# Altium PCB biv2-LRF_1a.PcbDoc
Units mm, origin at the board's own origin, x right, y up, seen from the top; angles counter-clockwise.
Board outline 54 x 54 mm, 2 copper layers (Top Layer, Bottom Layer), stack 1.536 mm thick; 89 components, 70 nets, 305 pads, 152 vias.
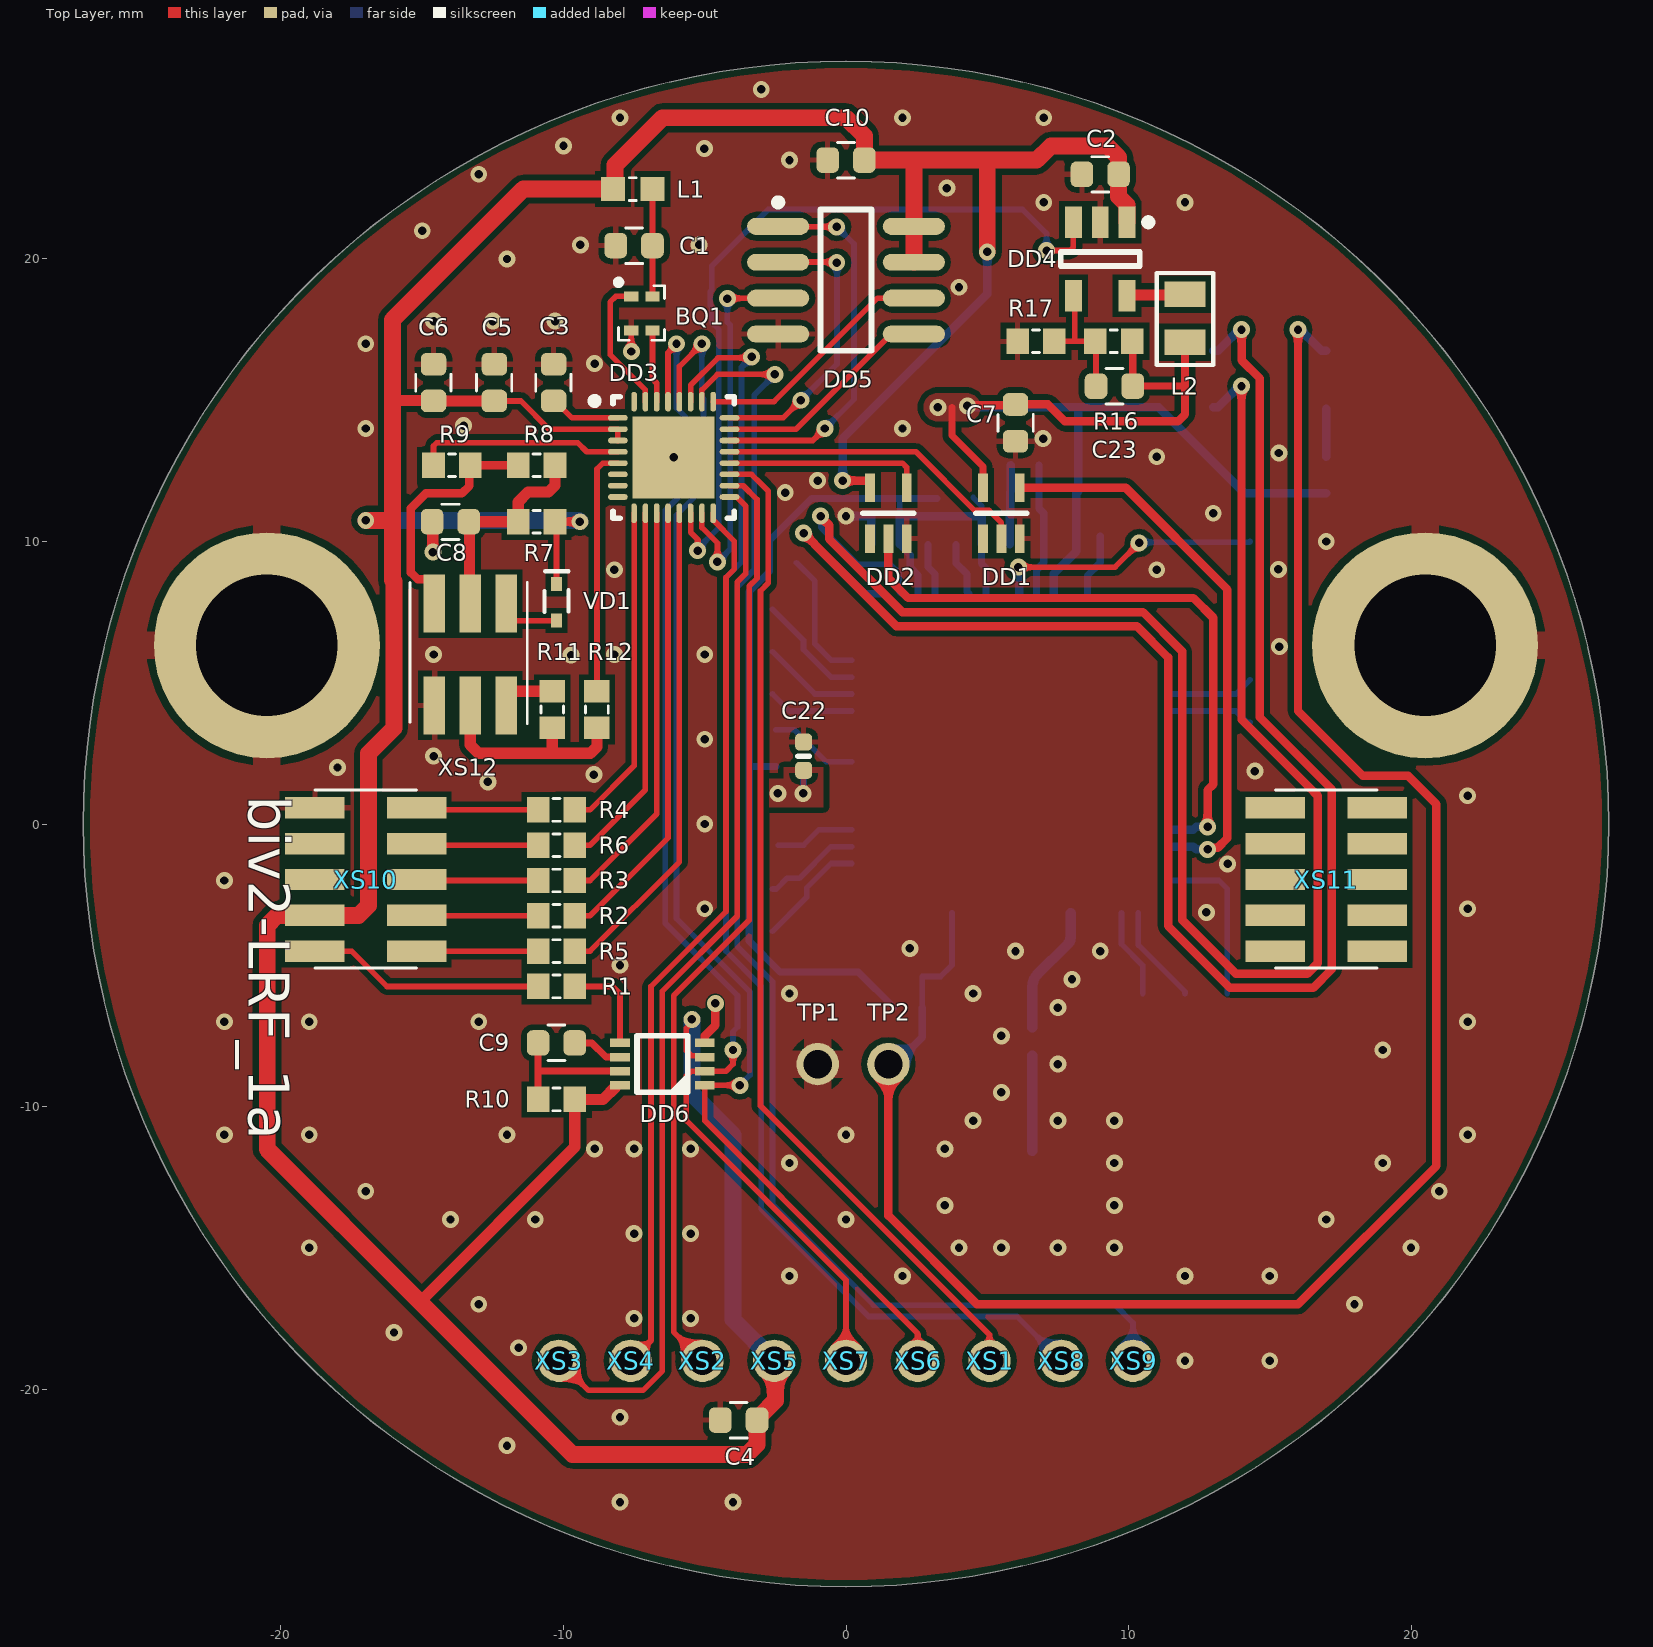
[diagram p0: Top Layer view]
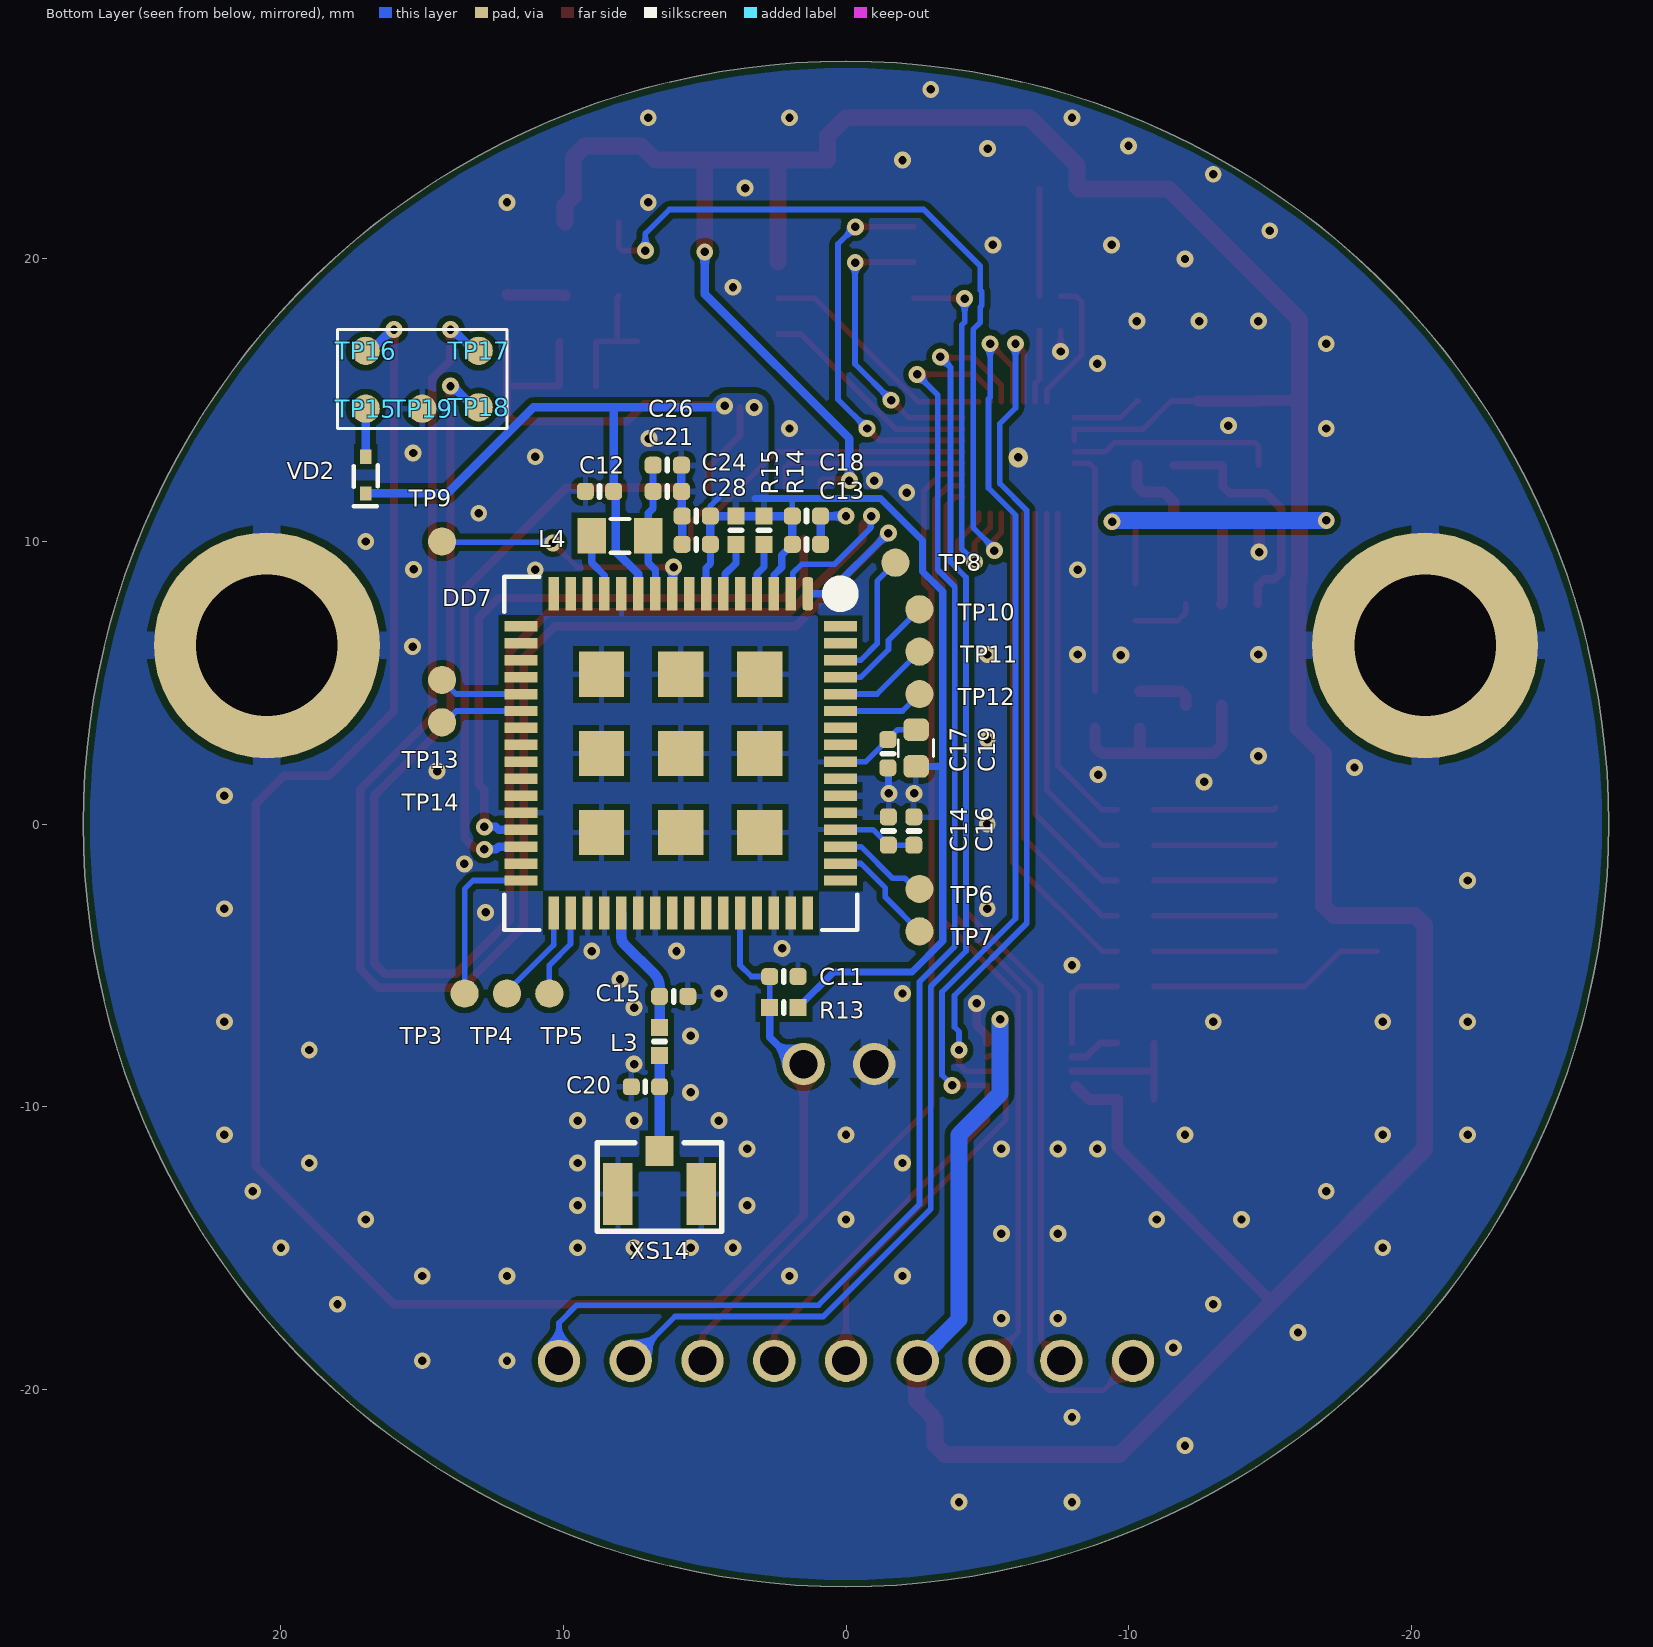
[diagram p1: Bottom Layer view, seen from below]
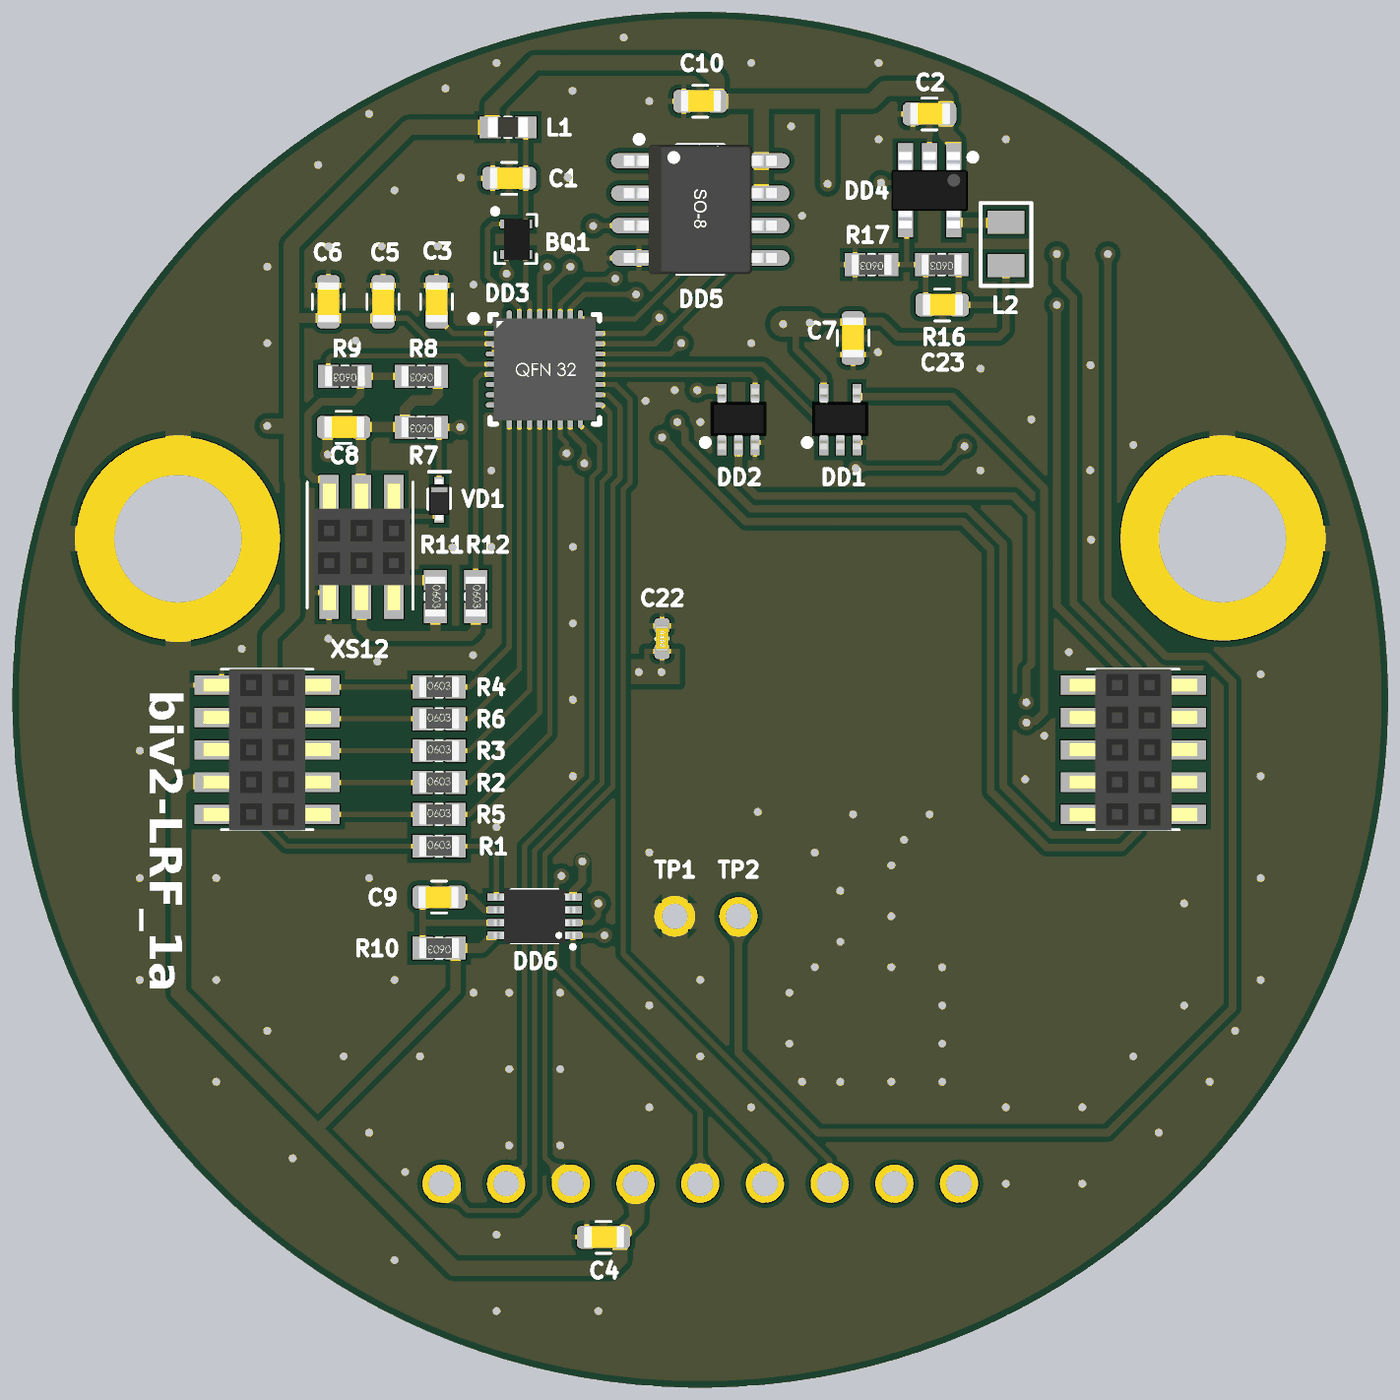
[diagram p2: 3D render of the assembled board from above, using the file's embedded part models]
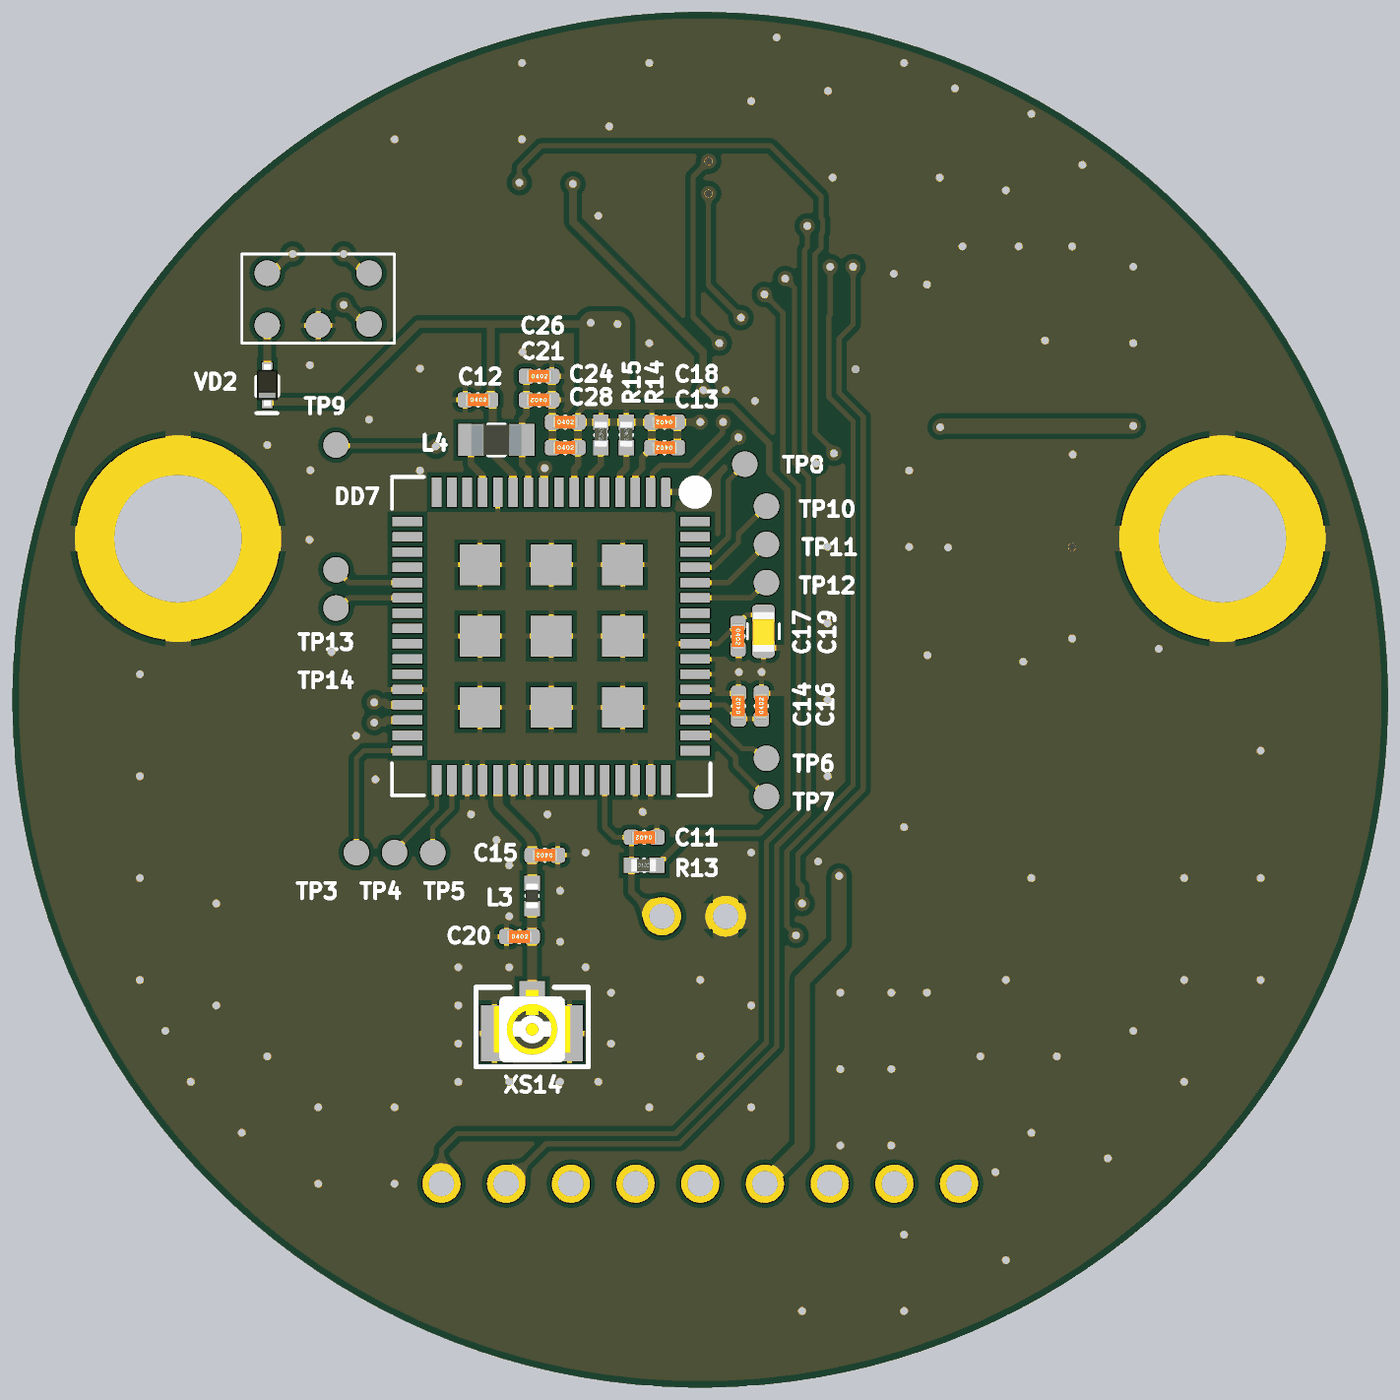
[diagram p3: 3D render of the assembled board from below, using the file's embedded part models]

## Layer stack, top to bottom
Top Solder: solder mask 0.0254, SM-001, Dk 4
Top Layer: signal copper 0.018
Dielectric 1: core 1.5, FR4, Dk 4.6
Bottom Layer: signal copper 0.018
Bottom Solder: solder mask 0.0254, SM-001, Dk 4

## Board outline
-27,0 ccw(c0,0) 0,-27 ccw(c0,0) 27,0 ccw(c0,0) 0,27 ccw(c0,0)

## Design rules (kind name [scope] priority, off if disabled: settings)
AcuteAngle [All] p1: minimum=3.50000000000000E+0001 checktracksonly=FALSE
BoardOutlineClearance "BoardOutlineClearance 1" [All] p1: gap=0.25 ignorepadtopadclearanceinfootprint=FALSE except(0: Arc-SplitContinuation Track-SplitContinuation SMDPad-SplitContinuation THPad-SplitContinuation Via-SplitContinuation Fill-SplitContinuation Poly-SplitContinuation Region-SplitContinuation Text-SplitContinuation) // Milling
BoardOutlineClearance "BoardOutlineClearance 2" [All] p2: gap=0.4 ignorepadtopadclearanceinfootprint=FALSE except(0: Arc-SplitContinuation Track-SplitContinuation SMDPad-SplitContinuation THPad-SplitContinuation Via-SplitContinuation Fill-SplitContinuation Poly-SplitContinuation Region-SplitContinuation Text-SplitContinuation) // V-Cut
Clearance "Clearance-1 1 Oz" [All] p1: gap=0.2 ignorepadtopadclearanceinfootprint=TRUE except(0.25: Arc-Hole Track-Hole SMDPad-Hole THPad-Hole Via-Hole Fill-Hole Poly-Hole Region-Hole Text-Hole) // Standart
Clearance "Clearance-1 1/2 Oz" [All] p2: gap=0.125 ignorepadtopadclearanceinfootprint=FALSE except(0.2: Arc-Fill Arc-Poly Track-Fill Track-Poly SMDPad-SMDPad SMDPad-Fill SMDPad-Poly THPad-Fill THPad-Poly Via-Fill Via-Poly Fill-Fill Fill-Poly Poly-Poly Poly-Region Poly-Text; 0.25: Arc-Hole Track-Hole SMDPad-Hole THPad-Hole Via-Hole Fill-Hole Poly-Hole Region-Hole Text-Hole) // Standart
DiffPairsRouting "DiffPairsRouting 1 Oz" [All] p1: maxlimit=0.254 minlimit=0.2 mostfreqgap=0.254 toplayer_minwidth=0.2 toplayer_maxwidth=0.381 toplayer_prefwidth=0.381 bottomlayer_minwidth=0.2 bottomlayer_maxwidth=0.381 bottomlayer_prefwidth=0.381 maxuncoupledlength=12.7
DiffPairsRouting "DiffPairsRouting 1/2 Oz" [All] p2: maxlimit=0.254 minlimit=0.1 mostfreqgap=0.254 toplayer_minwidth=0.1 toplayer_maxwidth=0.381 toplayer_prefwidth=0.381 bottomlayer_minwidth=0.1 bottomlayer_maxwidth=0.381 bottomlayer_prefwidth=0.381 maxuncoupledlength=12.7
HoleSize "Minimum HoleSize" [IsPad] p1: absolutevalues=TRUE maxlimit=5.9 minlimit=0.6 maxpercent=80.000 minpercent=20.000
HoleSize "Minimum HoleSize VIA 1" [IsVia] p2: absolutevalues=TRUE maxlimit=5.9 minlimit=0.3 maxpercent=80.000 minpercent=20.000 // Standart
HoleToHoleClearance Hole2HoleClearance [All] p1: gap=0.25 allowstackedmicrovias=FALSE
MinimumAnnularRing "Minimum AR VIA Standart" [IsVia] p1: minimumring=0.15
MinimumAnnularRing "Minimum AR PAD Standart" [IsPAD] p2: minimumring=0.2
MinimumAnnularRing "Minimum AR VIA Advance" [IsVia] p3: minimumring=0.1
MinimumAnnularRing "Minimum AR PAD Advance" [IsPAD] p4: minimumring=0.15
MinimumSolderMaskSliver "SolderMask Bridge Standart" [All] p1: minsoldermaskwidth=0.15 // All Masks
MinimumSolderMaskSliver "SolderMask Bridge Advance" [All] p2: minsoldermaskwidth=0.1 // Mask LDI
PlaneClearance "PlaneClearance 1 Oz" [All] p1: clearance=0.2
PlaneClearance "PlaneClearance-1 1/2 Oz" [All] p2: clearance=0.2 // Standart
PlaneConnect "TermalConnect-1 1 Oz" [All] p1: planeconnectstyle=Relief reliefexpansion=0.2 reliefentries=4 reliefconductorwidth=0.2 reliefairgap=0.2 // Standart
PolygonConnect [InNet('GND')] p1: thpad.connectstyle=Relief thpad.reliefconductorwidth=1 thpad.reliefentries=4 thpad.polygonreliefangle="90 Angle" thpad.airgapwidth=0.254 smdpad.connectstyle=Relief smdpad.reliefconductorwidth=0.2 smdpad.reliefentries=4 smdpad.polygonreliefangle="90 Angle" smdpad.airgapwidth=0.2 via.connectstyle=Direct via.reliefconductorwidth=0.254 via.reliefentries=4 via.polygonreliefangle="90 Angle" via.airgapwidth=0.254
PolygonConnect "PolygonConnect-1 1 Oz" [All] p2: thpad.connectstyle=Relief thpad.reliefconductorwidth=0.2 thpad.reliefentries=4 thpad.polygonreliefangle="90 Angle" thpad.airgapwidth=0.2 smdpad.connectstyle=Relief smdpad.reliefconductorwidth=0.2 smdpad.reliefentries=4 smdpad.polygonreliefangle="90 Angle" smdpad.airgapwidth=0.2 via.connectstyle=Direct via.reliefconductorwidth=0.254 via.reliefentries=4 via.polygonreliefangle="90 Angle" via.airgapwidth=0.254 // Standart
PolygonConnect "PolygonConnect-1 1/2 Oz" [All] p3: thpad.connectstyle=Relief thpad.reliefconductorwidth=0.15 thpad.reliefentries=4 thpad.polygonreliefangle="90 Angle" thpad.airgapwidth=0.2 smdpad.connectstyle=Relief smdpad.reliefconductorwidth=0.2 smdpad.reliefentries=4 smdpad.polygonreliefangle="90 Angle" smdpad.airgapwidth=0.2 via.connectstyle=Direct via.reliefconductorwidth=0.254 via.reliefentries=4 via.polygonreliefangle="90 Angle" via.airgapwidth=0.254 // Standart
RoutingCorners [All] p1 off: cornerstyle=45-Degree minsetback=2.54 maxsetback=2.54
RoutingVias [All] p1: holewidth=0.3 width=0.6 viastyle="Through Hole" minholewidth=0.2 minwidth=0.4 maxholewidth=5.9 maxwidth=6.4
SilkToSilkClearance Silk2SilkClearance [All] p1 off: silktosilkclearance=0.15
SilkToSolderMaskClearance Silk2SolderMaskClearance [IsPad] p1 off: minsilkscreentomaskgap=0.15 clearancetoexposedcopper=TRUE
SolderMaskExpansion SolderMaskExpansion-1 [All] p1: expansion=0.05 istentingtop=FALSE // Standart
SolderMaskExpansion "SolderMaskExpansion LDI" [All] p2: expansion=0.025 istentingtop=FALSE // Advance
UnRoutedNet [All] p1: checkbadconnections=TRUE
Width RF [InNet('RF_ANT')] p1: maxlimit=2.624 minlimit=0.254 preferedwidth=2.624 impedanceprofiledriven=TRUE impedanceprofileid={FF087167-1A2B-4C9D-A4B8-2F5CF9C435BE} impedanceprofilevalue=50.000000 minimp=50.000000 maximp=50.000000 favimp=50.000000
Width "Width 1 Oz" [All] p2: maxlimit=10 minlimit=0.15 preferedwidth=0.2 checkconnectedcopper=TRUE
Width "Width 1/2 Oz" [All] p3: maxlimit=10 minlimit=0.1 preferedwidth=0.125 checkconnectedcopper=TRUE
20 further rules are at their usual default settings.

## Classes and differential pairs
component class MCUModule: BQ1 C1 C2 C3 C4 C5 C6 C7 C8 C9 C10 C23 DD1 DD2 DD3 DD4 DD5 DD6 L1 L2 R1 R2 R3 R4 R5 R6 R7 R8 R9 R10 R11 R12 R16 R17 SCL SDA VD1 XS1 XS2 XS3 XS4 XS5 XS6 XS7 XS8 XS9 XS10 XS11 XS12
component class LoraModule: C11 C12 C13 C14 C15 C16 C17 C18 C19 C20 C21 C22 C24 C26 C28 DD7 L3 L4 R13 R14 R15 TP1 TP2 TP3 TP4 TP5 TP6 TP7 TP8 TP9 TP10 TP11 TP12 TP13 TP14 TP15 TP16 TP17 TP18 TP19 VD2 XS14

## Components (designator, comment, footprint, x,y, rotation, side; value= is the part's Value field where it differs from the comment)
BQ1 "AMPMGFB-48.0000T" AMPMGFB(1.6x1.2) -7.6,18.675 r270 top
C1 "Ceramic capacitor, 0.1μF, X7R, ±10%, 16V, 0603, -55...+125°C" "CAP: 0603" -7.5,20.475 r0 top value=0.1μF
C2 "Ceramic capacitor, 4.7u, X7R, ±10%, 16V, 0603, -55...+125°C" "CAP: 0603" 9,23 r0 top value=4.7u
C3 "Ceramic capacitor, 0.1μF, X7R, ±10%, 16V, 0603, -55...+125°C" "CAP: 0603" -10.35,15.625 r270 top value=0.1μF
C4 "Ceramic capacitor, 4.7μF, X7R, ±10%, 16V, 0603, -55...+125°C" "CAP: 0603" -3.8,-21.1 r0 top value=4.7μF
C5 "Ceramic capacitor, 0.1μF, X7R, ±10%, 16V, 0603, -55...+125°C" "CAP: 0603" -12.45,15.625 r270 top value=0.1μF
C6 "Ceramic capacitor, 4.7μF, X7R, ±10%, 16V, 0603, -55...+125°C" "CAP: 0603" -14.6,15.625 r270 top value=4.7μF
C7 "Ceramic capacitor, 10u, X7R, ±10%, 16V, 0603, -55...+125°C" "CAP: 0603" 6,14.2 r90 top value=10u
C8 "Ceramic capacitor, 0.1μF, X7R, ±10%, 16V, 0603, -55...+125°C" "CAP: 0603" -14,10.7 r0 top value=0.1μF
C9 "Ceramic capacitor, 0.1μF, X7R, ±10%, 16V, 0603, -55...+125°C" "CAP: 0603" -10.25,-7.75 r180 top value=0.1μF
C10 "Ceramic capacitor, 0.1μF, X7R, ±10%, 16V, 0603, -55...+125°C" "CAP: 0603" 0,23.5 r0 top value=0.1μF
C11 "Ceramic capacitor, 0.1μF, X7R, ±10%, 16V, 0402, -55...+125°C" "CAP: 0402" 2.2,-5.4 r0 bottom value=0.1μF
C12 "Ceramic capacitor, 0.1uF, X7R, ±10%, 16V, 0402, -55...+125°C" "CAP: 0402" 8.725,11.775 r180 bottom value=0.1uF
C13 "Ceramic capacitor, 0.1uF, X7R, ±10%, 16V, 0402, -55...+125°C" "CAP: 0402" 1.4,9.9 r0 bottom value=0.1uF
C14 "Ceramic capacitor, 33pF, X7R, ±10%, 16V, 0402, -55...+125°C" "CAP: 0402" -1.5,-0.247 r90 bottom value=33pF
C15 "Ceramic capacitor, 3.3pF, X7R, ±10%, 16V, 0402, -55...+125°C" "CAP: 0402" 6.1,-6.1 r0 bottom value=3.3pF
C16 "Ceramic capacitor, 33pF, X7R, ±10%, 16V, 0402, -55...+125°C" "CAP: 0402" -2.4,-0.247 r90 bottom value=33pF
C17 "Ceramic capacitor, 1nF, X7R, ±10%, 16V, 0402, -55...+125°C" "CAP: 0402" -1.482,2.489 r270 bottom value=1nF
C18 "Ceramic capacitor, 0.1uF, X7R, ±10%, 16V, 0402, -55...+125°C" "CAP: 0402" 1.4,10.9 r0 bottom value=0.1uF
C19 "Ceramic capacitor, 4.7μF, X7R, ±10%, 16V, 0603, -55...+125°C" "CAP: 0603" -2.482,2.689 r270 bottom value=4.7μF
C20 "Ceramic capacitor, 3.3pF, X7R, ±10%, 16V, 0402, -55...+125°C" "CAP: 0402" 7.1,-9.3 r180 bottom value=3.3pF
C21 "Ceramic capacitor, 0.1uF, X7R, ±10%, 16V, 0402, -55...+125°C" "CAP: 0402" 6.325,11.775 r0 bottom value=0.1uF
C22 "Ceramic capacitor, 1nF, X7R, ±10%, 16V, 0402, -55...+125°C" "CAP: 0402" -1.5,2.4 r270 top value=1nF
C23 "Ceramic capacitor, 33p, X7R, ±10%, 16V, 0603, -55...+125°C" "CAP: 0603" 9.5,15.5 r0 top value=33p
C24 "Ceramic capacitor, 0.1uF, X7R, ±10%, 16V, 0402, -55...+125°C" "CAP: 0402" 5.3,10.9 r180 bottom value=0.1uF
C26 "Ceramic capacitor, 0.47uF, X7R, ±10%, 16V, 0402, -55...+125°C" "CAP: 0402" 6.325,12.7 r180 bottom value=0.47uF
C28 "Ceramic capacitor, 0.1uF, X7R, ±10%, 16V, 0402, -55...+125°C" "CAP: 0402" 5.3,9.9 r180 bottom value=0.1uF
DD1 "SN74LV1T34DCK" SC70-5 5.5,11 r90 top
DD2 "SN74LV1T34DCK" SC70-5 1.5,11 r90 top
DD3 "EFM8BB31F64G-A-QFN32" 32-QFN(4x4) -6.1,12.975 r0 top
DD4 "TPS62243DRV" SOT23-5 9,20 r270 top
DD5 "FM25CL64B-G" SO-8_N 0,19.25 r0 top
DD6 "SN74LVC1G123" 8-VSSOP -6.5,-8.5 r90 top
DD7 "ST50H" ST50H 5.85,2.5 r270 bottom
L1 "BLM18AG102SN1D" "IND: 0603" -7.55,22.475 r0 top
L2 "VLF302515MT" VLF302515MT 12,18.75 r270 top value=2.2uH
L3 "Fixed inductor, 8.2nH, ±5%, 0402, 200mA, -55...+125°C" "IND: 0402" 6.6,-7.7 r270 bottom value=8.2nH
L4 "Fixed inductor, 15μH, ±20%, 0805, 100mA, -55...+125°C" "IND: 0805" 8,10.2 r180 bottom value=15μH
R1 "Resistor film, 100, ±5%, 0603, 0.1W, -55...+125°C" "RES: 0603" -10.25,-5.75 r0 top value=100
R2 "Resistor film, 100, ±5%, 0603, 0.1W, -55...+125°C" "RES: 0603" -10.25,-3.25 r0 top value=100
R3 "Resistor film, 100, ±5%, 0603, 0.1W, -55...+125°C" "RES: 0603" -10.25,-2 r0 top value=100
R4 "Resistor film, 100, ±5%, 0603, 0.1W, -55...+125°C" "RES: 0603" -10.25,0.5 r0 top value=100
R5 "Resistor film, 100, ±5%, 0603, 0.1W, -55...+125°C" "RES: 0603" -10.25,-4.5 r0 top value=100
R6 "Resistor film, 100, ±5%, 0603, 0.1W, -55...+125°C" "RES: 0603" -10.25,-0.75 r0 top value=100
R7 "Resistor film, 1k, ±5%, 0603, 0.1W, -55...+125°C" "RES: 0603" -10.95,10.7 r180 top value=1k
R8 "Resistor film, 1k, ±5%, 0603, 0.1W, -55...+125°C" "RES: 0603" -10.95,12.7 r180 top value=1k
R9 "Resistor film, 100, ±5%, 0603, 0.1W, -55...+125°C" "RES: 0603" -13.95,12.7 r180 top value=100
R10 "Resistor film, 100, ±5%, 0603, 0.1W, -55...+125°C" "RES: 0603" -10.25,-9.75 r180 top value=100
R11 "Resistor film, 1k, ±5%, 0603, 0.1W, -55...+125°C" "RES: 0603" -10.4,4.05 r270 top value=1k
R12 "Resistor film, 100, ±5%, 0603, 0.1W, -55...+125°C" "RES: 0603" -8.817,4.05 r270 top value=100
R13 "Resistor film, 47K, ±5%, 0402, 0.063W, -55...+125°C" "RES: 0402" 2.2,-6.5 r180 bottom value=47K
R14 "Resistor film, 0R, ±5%, 0402, 0.063W, -55...+125°C" "RES: 0402" 2.9,10.4 r270 bottom value=0R
R15 "Resistor film, 0R, ±5%, 0402, 0.063W, -55...+125°C" "RES: 0402" 3.9,10.4 r270 bottom value=0R
R16 "Resistor film, 360k, ±5%, 0603, 0.1W, -55...+125°C" "RES: 0603" 9.477,17.085 r180 top value=360k
R17 "Resistor film, 180k, ±5%, 0603, 0.1W, -55...+125°C" "RES: 0603" 6.727,17.085 r180 top value=180k
TP1 "Testpoint_HS1mm" "TestPoint(without 3D)" -1,-8.5 r0 top
TP2 "Testpoint_HS1mm" "TestPoint(without 3D)" 1.5,-8.5 r0 top
TP3 "Testpoint_HS1mm" "TestPoint(without hole)"#1 13.5,-6 r90 bottom
TP4 "Testpoint_HS1mm" "TestPoint(without hole)"#1 12,-6 r90 bottom
TP5 "Testpoint_HS1mm" "TestPoint(without hole)"#1 10.5,-6 r90 bottom
TP6 "Testpoint_HS1mm" "TestPoint(without hole)"#2 -2.5,-2.3 r90 bottom
TP7 "Testpoint_HS1mm" "TestPoint(without hole)"#2 -2.5,-3.8 r90 bottom
TP8 "Testpoint_HS1mm" "TestPoint(without hole)"#1 -1.75,9.25 r90 bottom
TP9 "Testpoint_HS1mm" "TestPoint(without hole)"#1 14.3,10 r90 bottom
TP10 "Testpoint_HS1mm" "TestPoint(without hole)"#1 -2.6,7.6 r0 bottom
TP11 "Testpoint_HS1mm" "TestPoint(without hole)"#1 -2.6,6.1 r90 bottom
TP12 "Testpoint_HS1mm" "TestPoint(without hole)"#1 -2.6,4.6 r0 bottom
TP13 "Testpoint_HS1mm" "TestPoint(without hole)"#1 14.3,5.1 r0 bottom
TP14 "Testpoint_HS1mm" "TestPoint(without hole)"#1 14.3,3.6 r0 bottom
TP15 "Testpoint_HS1mm" "TestPoint(without hole)"#1 17,14.7 r180 bottom
TP16 "Testpoint_HS1mm" "TestPoint(without hole)"#1 17,16.75 r270 bottom
TP17 "Testpoint_HS1mm" "TestPoint(without hole)"#1 13,16.75 r180 bottom
TP18 "Testpoint_HS1mm" "TestPoint(without hole)"#1 13,14.75 r180 bottom
TP19 "Testpoint_HS1mm" "TestPoint(without hole)"#1 15,14.7 r270 bottom
VD1 "Schottky diode, 80V, 500mA, 1V, 15pF, SOD-123, -55...+150°C" "DIODE: SOD523" -10.25,7.2 r90 top
VD2 "Schottky diode, 80V, 500mA, 1V, 15pF, SOD-123, -55...+150°C" "DIODE: SOD523" 17,13 r270 bottom
XS1 "Testpoint_HS1mm" "TestPoint(without 3D)" 5.08,-19 r0 top locked
XS2 "Testpoint_HS1mm" "TestPoint(without 3D)" -5.08,-19 r0 top locked
XS3 "Testpoint_HS1mm" "TestPoint(without 3D)" -10.16,-19 r0 top locked
XS4 "Testpoint_HS1mm" "TestPoint(without 3D)" -7.62,-19 r0 top locked
XS5 "Testpoint_HS1mm" "TestPoint(without 3D)" -2.54,-19 r0 top locked
XS6 "Testpoint_HS1mm" "TestPoint(without 3D)" 2.54,-19 r0 top locked
XS7 "Testpoint_HS1mm" "TestPoint(without 3D)" 0,-19 r0 top locked
XS8 "Testpoint_HS1mm" "TestPoint(without 3D)" 7.62,-19 r0 top locked
XS9 "Testpoint_HS1mm" "TestPoint(without 3D)" 10.16,-19 r0 top locked
XS10 "PBD1.27-10SA" "CON: PBD-10-1.27S" -17,-2 r90 top locked
XS11 "PBD1.27-10SA" "CON: PBD-10-1.27S" 17,-2 r90 top locked
XS12 "PBD 1.27-6R" "CON: PBD1.27-6" -12.03,7.8 r180 top
XS14 "Connector u.FL, 50 Ohm, 6GHz" "CON: u.Fl" 6.6,-13.1 r0 bottom

## Footprints (in the part's own frame and the unit in brackets; to place one, negate y for a bottom-side part, rotate by r counter-clockwise, add the part's x,y. Pads: shape width x height; smd on the part's side, far side on the other; paste and mask are expansions set on the pad)
8-VSSOP [mm]
  rect 0.3x0.7 smd: 1(-0.75,-1.5) 2(-0.25,-1.5) 3(0.25,-1.5) 4(0.75,-1.5) 5(0.75,1.5) 6(0.25,1.5) 7(-0.25,1.5) 8(-0.75,1.5)
  round 0.3 on Top Overlay: ""(-1.2,-1.5)
  round 0.3 on Mech1: ""(-0.75,-1.3)
  silkscreen extent -1,-0.9 1,0.9, body extent -1.05,-1.6 1.05,1.6, height 0.9
32-QFN(4x4) [mm] "QFN, 32-Leads, Body 4,00x4,00mm, Pitch 0,40mm, Thermal Pad 2,90x2,90mm, IPC Medium Density"
  rect 2.9x2.9 smd: 0(0,0)
  oval 0.7x0.2 smd: 1(-1.975,1.4) 2(-1.975,1) 3(-1.975,0.6) 4(-1.975,0.2) 5(-1.975,-0.2) 6(-1.975,-0.6) 7(-1.975,-1) 8(-1.975,-1.4) 17(1.975,-1.4) 18(1.975,-1) 19(1.975,-0.6) 20(1.975,-0.2) 21(1.975,0.2) 22(1.975,0.6) 23(1.975,1) 24(1.975,1.4)
  oval 0.2x0.7 smd: 9(-1.4,-1.975) 10(-1,-1.975) 11(-0.6,-1.975) 12(-0.2,-1.975) 13(0.2,-1.975) 14(0.6,-1.975) 15(1,-1.975) 16(1.4,-1.975) 25(1.4,1.975) 26(1,1.975) 27(0.6,1.975) 28(0.2,1.975) 29(-0.2,1.975) 30(-0.6,1.975) 31(-1,1.975) 32(-1.4,1.975)
  silkscreen extent -2.92,-2.15 2.15,2.15, body extent -2,-2 2,2, height 0.57
AMPMGFB(1.6x1.2) [mm]
  rect 0.35x0.5 smd: 1(0,0) 2(1.2,0) 3(1.2,0.75) 4(0,0.75)
  silkscreen extent -0.57,-0.8 1.55,1.17, body extent -0.2,-0.1 1.4,0.9, height 0.5
"CAP: 0402" [mm]
  rrect50% 0.6x0.6 smd: 1(-0.5,0) 2(0.5,0)
  silkscreen extent 0,-0.2 0,0.2, body extent -0.51,-0.25 0.51,0.25, height 0.51
"CAP: 0603" [mm]
  rrect50% 0.8x0.9 smd: 1(-0.65,0) 2(0.65,0)
  silkscreen extent -0.3,-0.63 0.3,0.62, body extent -0.78,-0.43 0.83,0.44, height 0.8
"CON: PBD1.27-6" [mm]
  rect 0.76x2.05 smd: 1(0,0) 2(0,3.6) 3(1.27,0) 4(1.27,3.6) 5(2.54,0) 6(2.54,3.6)
  silkscreen extent -0.75,-0.75 3.4,4.25, body extent -0.63,-0.7 3.18,4.3, height 4.5
"CON: PBD-10-1.27S" [mm]
  rect 0.76x2.1 smd: 1(-2.505,-1.8) 2(-2.505,1.8) 3(-1.235,-1.8) 4(-1.235,1.8) 5(0.035,-1.8) 6(0.035,1.8) 7(1.305,-1.8) 8(1.305,1.8) 9(2.575,-1.8) 10(2.575,1.8)
  silkscreen extent -3.1,-1.8 3.2,1.8, body extent -3.14,-2.5 3.21,2.5, height 4.5
"CON: u.Fl" [mm]
  rect 1x1.05 smd: 1(0,-1.525)
  rect 1.05x2.2 smd: 2(-1.475,0) 2(1.475,0)
  silkscreen extent -2.2,-1.81 2.2,1.31, body extent -1.5,-1.71 1.5,1.14, height 1.27
"DIODE: SOD523" [mm]
  rect 0.5x0.4 smd: 1(0,0) 2(1.3,0)
  silkscreen extent 0.3,-0.43 1.75,0.43, body extent -0.17,-0.4 1.48,0.4, height 0.65
"IND: 0402" [mm]
  rect 0.6x0.6 smd: 1(-0.5,0) 2(0.5,0)
  silkscreen extent 0,-0.2 0,0.2, body extent -0.5,-0.25 0.5,0.25, height 0.5
"IND: 0603" [mm]
  rect 0.85x0.85 smd: 1(-0.7,0) 2(0.7,0)
  silkscreen extent -0.13,-0.4 0.13,0.4, body extent -0.8,-0.4 0.8,0.4, height 0.8
"IND: 0805" [mm]
  rect 1x1.25 smd: 1(-1,0) 2(1,0)
  silkscreen extent -0.33,-0.6 0.33,0.6, body extent -1,-0.62 1,0.63, height 0.85
"RES: 0402" [mm]
  rect 0.6x0.6 smd: 1(-0.5,0) 2(0.5,0)
  silkscreen extent 0,-0.2 0,0.2, body extent -0.52,-0.25 0.48,0.25, height 0.34
"RES: 0603" [mm]
  rect 0.8x0.9 smd: 1(-0.65,0) 2(0.65,0)
  silkscreen extent -0.13,-0.4 0.13,0.4, body extent -0.8,-0.4 0.8,0.4, height 0.44
SC70-5 [mm] "pitch 0.95 mm"
  rect 1x0.35 smd: 1(-0.9,0.65) 2(-0.9,0) 3(-0.9,-0.65) 4(0.9,-0.65) 5(0.9,0.65)
  round 0.5 on Top Overlay: ""(-0.9,1.3)
  round 0.5 on Mech15: ""(-0.775,0.725)
  silkscreen extent 0,-0.9 0,0.9, body extent -1.18,-1.1 1.22,1.1, height 1.09
SO-8_N [mm] "8-Pin Small Outline Integrated Circuit 1.27 mm Pitch, IPC Medium Density"
  oval 2.2x0.6 smd: 1(-2.4,1.905) 2(-2.4,0.635) 3(-2.4,-0.635) 4(-2.4,-1.905) 5(2.4,-1.905) 6(2.4,-0.635) 7(2.4,0.635) 8(2.4,1.905)
  silkscreen extent -2.52,-2.5 0.9,2.88, body extent -3,-2.54 3,2.54, height 1.7
SOT23-5 [mm] "pitch 0.95 mm"
  rect 1.1x0.6 smd: 1(-1.3,0.95) 2(-1.3,0) 3(-1.3,-0.95) 4(1.3,-0.95) 5(1.3,0.95)
  round 0.5 on Mech13: ""(-1.1,1.1)
  silkscreen extent -1.42,-1.4 0.25,1.83, body extent -1.5,-1.5 1.5,1.5, height 1.3
ST50H [mm]
  rrect50% 1.17x0.37 smd: 1(-5.65,4.5)
  rect 1.17x0.37 smd: 2(-5.65,3.9) 3(-5.65,3.3) 4(-5.65,2.7) 5(-5.65,2.1) 6(-5.65,1.5) 7(-5.65,0.9) 8(-5.65,0.3) 9(-5.65,-0.3) 10(-5.65,-0.9) 11(-5.65,-1.5) 12(-5.65,-2.1) 13(-5.65,-2.7) 14(-5.65,-3.3) 15(-5.65,-3.9) 16(-5.65,-4.5) 33(5.65,-4.5) 34(5.65,-3.9) 35(5.65,-3.3) 36(5.65,-2.7) 37(5.65,-2.1) 38(5.65,-1.5) 39(5.65,-0.9) 40(5.65,-0.3) 41(5.65,0.3) 42(5.65,0.9) 43(5.65,1.5) 44(5.65,2.1) 45(5.65,2.7) 46(5.65,3.3) 47(5.65,3.9) 48(5.65,4.5)
  rect 0.37x1.17 smd: 17(-4.5,-5.65) 18(-3.9,-5.65) 19(-3.3,-5.65) 20(-2.7,-5.65) 21(-2.1,-5.65) 22(-1.5,-5.65) 23(-0.9,-5.65) 24(-0.3,-5.65) 25(0.3,-5.65) 26(0.9,-5.65) 27(1.5,-5.65) 28(2.1,-5.65) 29(2.7,-5.65) 30(3.3,-5.65) 31(3.9,-5.65) 32(4.5,-5.65) 49(4.5,5.65) 50(3.9,5.65) 51(3.3,5.65) 52(2.7,5.65) 53(2.1,5.65) 54(1.5,5.65) 55(0.9,5.65) 56(0.3,5.65) 57(-0.3,5.65) 58(-0.9,5.65) 59(-1.5,5.65) 60(-2.1,5.65) 61(-2.7,5.65) 62(-3.3,5.65) 63(-3.9,5.65) 64(-4.5,5.65)
  rect 1.6x1.6 smd: 65(-2.8,-2.8) 65(-2.8,0) 65(-2.8,2.8) 65(0,-2.8) 65(0,0) 65(0,2.8) 65(2.8,-2.8) 65(2.8,0) 65(2.8,2.8)
  silkscreen extent -6.25,-6.25 6.25,6.25, body extent -6,-6 6,6, height 1.1
"TestPoint(without 3D)" [mm]
  round 1.5 hole 1: 1(0,0)
"TestPoint(without hole)"#1 [mm]
  round 1 smd: 1(0,0)
"TestPoint(without hole)"#2 [mm]
  round 1 smd: 1(0,-0.1)
VLF302515MT [mm]
  rect 0.9x1.45 smd: 1(0,0) 2(1.7,0)
  silkscreen extent -0.75,-1 2.5,1

## Part data
C1 C2 C3 C4 C5 C6 C7 C8 C9 C10 C19 C23: library part Ceramic_0603, Manufacturer=Yageo, Package=0603, PartNumber=CC0603KRX7R7BB104, Temperature=-55...+125°C, Tolerance=±10%, TypeCapacitor="Ceramic capacitor", TypeDielectric=X7R, Voltage=16V, HelpURL=https://www.digikey.com/product-detail/en/yageo/CC0603KRX7R7BB104/311-1088-1-ND/302998
  C1 C3 C5 C8 C9 C10: ValueManufacturerPartNumber="Ceramic capacitor, 0.1μF, X7R, ±10%, 16V, 0603, -55...+125°C"
  C2: ValueManufacturerPartNumber="Ceramic capacitor, 4.7u, X7R, ±10%, 16V, 0603, -55...+125°C"
  C4 C6 C19: ValueManufacturerPartNumber="Ceramic capacitor, 4.7μF, X7R, ±10%, 16V, 0603, -55...+125°C"
  C7: ValueManufacturerPartNumber="Ceramic capacitor, 10u, X7R, ±10%, 16V, 0603, -55...+125°C"
  C23: ValueManufacturerPartNumber="Ceramic capacitor, 33p, X7R, ±10%, 16V, 0603, -55...+125°C"
C11 C12 C13 C14 C15 C16 C17 C18 C20 C21 C22 C24 C26 C28: library part Ceramic_0402, Manufacturer=Yageo, Package=0402, PartNumber=CC0402KRX7R7BB104, Temperature=-55...+125°C, Tolerance=±10%, TypeCapacitor="Ceramic capacitor", TypeDielectric=X7R, Voltage=16V, HelpURL=https://www.digikey.com/product-detail/en/yageo/CC0402KRX7R7BB104/311-1338-1-ND/2103122
  C11: ValueManufacturerPartNumber="Ceramic capacitor, 0.1μF, X7R, ±10%, 16V, 0402, -55...+125°C"
  C12 C13 C18 C21 C24 C28: ValueManufacturerPartNumber="Ceramic capacitor, 0.1uF, X7R, ±10%, 16V, 0402, -55...+125°C"
  C14 C16: ValueManufacturerPartNumber="Ceramic capacitor, 33pF, X7R, ±10%, 16V, 0402, -55...+125°C"
  C15 C20: ValueManufacturerPartNumber="Ceramic capacitor, 3.3pF, X7R, ±10%, 16V, 0402, -55...+125°C"
  C17 C22: ValueManufacturerPartNumber="Ceramic capacitor, 1nF, X7R, ±10%, 16V, 0402, -55...+125°C"
  C26: ValueManufacturerPartNumber="Ceramic capacitor, 0.47uF, X7R, ±10%, 16V, 0402, -55...+125°C"
DD1 DD2: "Single Buffer", ComponentLink1Description=Datasheet, ComponentLink1URL=https://www.ti.com/lit/ds/symlink/sn74lv1t34.pdf?ts=1607003293244&ref_url=https%253A%252F%252Fwww.ti.com%252Fproduct%252FSN74LV1T34
DD3: "8051 MCU Core"
DD4: "Step-down converter 300mA"
DD5: "Микросхема", ReplacementPart1Manufacturer=ISSI, ReplacementPart1PartNumber=IS25C08-2ZLI-TR, ComponentLink1Description="Manufacturer Link", ComponentLink1URL=http://www.microchip.com, ComponentLink2Description=Datasheet, ComponentLink3Description="Packaging Specification", Manufacturer=FM25CL64B-G, PartNumber=FM25CL64B-G
DD6: "Monostable Multivibrator / With Schmitt-Trigger Inputs", ComponentLink1Description=Datasheet, ComponentLink1URL=https://www.ti.com/lit/ds/symlink/sn74lvc1g123.pdf?ts=1636961729203&ref_url=https%253A%252F%252Fwww.google.com%252F
DD7: "LoRa module"
L1: "100MHz 1K"
L3: library part Inductor_0402, Manufacturer="Murata Electronics", MaxCurrent=200mA, Package=0402, PartNumber=LQG15HSR10J02D, Temperature=-55...+125°C, Tolerance=±5%, TypeInductor="Fixed inductor", HelpURL=https://www.digikey.com/product-detail/en/murata-electronics-north-america/LQG15HSR10J02D/490-2635-1-ND/662915, ValueManufacturerPartNumber="Fixed inductor, 8.2nH, ±5%, 0402, 200mA, -55...+125°C"
L4: library part Inductor_0805, Manufacturer="Murata Electronics", MaxCurrent=100mA, Package=0805, PartNumber=LQM21FN100M70L, Temperature=-55...+125°C, Tolerance=±20%, TypeInductor="Fixed inductor", HelpURL=https://www.digikey.com/product-detail/en/murata-electronics-north-america/LQM21FN100M70L/490-4029-1-ND/1016289, ValueManufacturerPartNumber="Fixed inductor, 15μH, ±20%, 0805, 100mA, -55...+125°C"
R1 R2 R3 R4 R5 R6 R7 R8 R9 R10 R11 R12 R16 R17: library part Resistor_0603, Manufacturer=Yageo, Package=0603, PartNumber=RC0603JR-07100RL, Power=0.1W, Temperature=-55...+125°C, Tolerance=±5%, TypeResistor="Resistor film", HelpURL=https://www.digikey.com/product-detail/en/yageo/RC0603JR-07100RL/311-100GRCT-ND/729644
  R1 R2 R3 R4 R5 R6 R9 R10 R12: ValueManufacturerPartNumber="Resistor film, 100, ±5%, 0603, 0.1W, -55...+125°C"
  R7 R8 R11: ValueManufacturerPartNumber="Resistor film, 1k, ±5%, 0603, 0.1W, -55...+125°C"
  R16: ValueManufacturerPartNumber="Resistor film, 360k, ±5%, 0603, 0.1W, -55...+125°C"
  R17: ValueManufacturerPartNumber="Resistor film, 180k, ±5%, 0603, 0.1W, -55...+125°C"
R13 R14 R15: library part Resistor_0402, Manufacturer=Yageo, Package=0402, PartNumber=RC0402JR-07100RL, Power=0.063W, Temperature=-55...+125°C, Tolerance=±5%, TypeResistor="Resistor film", HelpURL=https://www.digikey.com/product-detail/en/yageo/RC0402JR-07100RL/311-100JRCT-ND/729362
  R13: ValueManufacturerPartNumber="Resistor film, 47K, ±5%, 0402, 0.063W, -55...+125°C"
  R14 R15: ValueManufacturerPartNumber="Resistor film, 0R, ±5%, 0402, 0.063W, -55...+125°C"
VD1 VD2: library part Schottky_single, Current=500mA, Manufacturer="Diodes Incorporated", Package=SOD-123, PartNumber=BAT54XV2, Temperature=-55...+150°C, Voltage=80V, VoltageDrop=1V, HelpURL=https://www.digikey.com/product-detail/en/diodes-incorporated/MBR0580S1-7/MBR0580S1-7DICT-ND/5080371, RecoveryTime=15pF, TypeDiode="Schottky diode", ValueManufacturerPartNumber="Schottky diode, 80V, 500mA, 1V, 15pF, SOD-123, -55...+150°C"
XS14: library part Connector_uFL, Frequency=6GHz, Manufacturer="Hirose Electric", PartNumber=U.FL-R-SMT(01), CommentText=uFl, HelpURL=https://www.digikey.com/product-detail/en/hirose-electric-co-ltd/U.FL-R-SMT-01/H9161-ND/513010, Impedance="50 Ohm", TypeConnector="Connector u.FL", ValueManufacturerPartNumber="Connector u.FL, 50 Ohm, 6GHz"
XS10 XS11: ComponentLink1Description=Datasheet, ComponentLink1URL=https://neokt593.ru/PBD%201.27%20-%2008SA%20PBD1.27-08SA

## Free pads (board coordinates)
  round 8 hole 5: 0(-20.5,6.325) 0(20.5,6.325)

## Via types
v1: diameter 0.6, hole 0.3, Top Layer to Bottom Layer, tented both sides, 151 vias
v2: diameter 0.7, hole 0.3, Top Layer to Bottom Layer, tented bottom, 1 vias

## Nets (pads, with @x,y where several pads share a name; then routed paths per layer and width w, separated by ;. In a path a pad name is that pad's centre, name@x,y a point inside that pad or via, vN(x,y) a via of type N, cw(c..) or ccw(c..) an arc to the next point about the centre after c; other vN are vias at no path point)
1V8: C7.2 C12.2 C13.2 C14.2 C16.2 C17.2 C18.2 C19.2 C22.2 C23.2 C24.2 C28.2 DD1.5 DD7.3 DD7.7 DD7.11 DD7.53 DD7.54 DD7.55 L2.2 R13.2 R14.1 R15.1 R16.1 VD2.2 | length 77.3
  Top Layer w0.25: 3.75,14.75 3.75,13.75 4.85,12.65 DD1.5 ; R16.1 10.15,17.062 C23.2 12,15.5
  Top Layer w0.3: v1(4.3,14.8) 4.325,14.825 5.975,14.825 C7.2 7.15,14.85 7.75,14.25 11.75,14.25 12,14.5 12,15.5 L2.2
  Bottom Layer w0.2: C18.2 1.9,11.383 ; 4.5,11.557 4.8,11.257 C24.2
  Bottom Layer w0.25: C19.2 -3.423,2.039 -3.425,2.041 ; v1(-1.519,1.085) -1.501,1.103 -1.501,1.971 C17.2 ; R13.2 0.433,-5.233 -2.333,-5.233 -3.425,-4.142 -3.425,2.041 ; C13.2 2.275,9.525 2.275,9.089 2.55,8.814 DD7.3 ; 3.225,11.525 -1.225,11.525 -2.712,10.038 -2.712,8.936 -3.425,8.224 -3.425,2.041 ; C28.2 4.8,9.213 4.95,9.063 DD7.7
  Bottom Layer w0.3: C13.2 C18.2 R14.1 R15.1 C24.2 C28.2 ; v1@4.25,14.75 8.225,14.75 ; DD7.11 7.35,8.85 8.15,9.65 8.15,11.7 C12.2 8.225,14.75 ; VD2.2 14.112,11.7 11.062,14.75 8.225,14.75
  other v1: -2.41,1.085 3.25,14.75
C2CK: R8.2 R9.1 XS12.5 | length 8.8
  Top Layer w0.3: XS12.5 -14.57,8.426 -14.8,8.656 -15.156,8.656 -15.4,8.9 -15.4,11.178 -14.878,11.7 -13.6,11.7 -13.33,11.97 -13.33,12.67 R9.1 R8.2
C2D: R11.1 XS12.2 | length 2
  Top Layer w0.4: XS12.2 -12.03,4.52 -11.85,4.7 R11.1
C2D_MCU: DD3.5 R12.1 | length 8.7
  Top Layer w0.2: R12.1 R12.1 -8.815,12.568 -8.608,12.775 DD3.5
C2Dsns: R11.2 R12.2 XS12.4 | length 7.7
  Top Layer w0.4: XS12.4 -13.3,2.8 -13,2.5 -10.5,2.5 ; R11.2 -10.4,2.6 -10.5,2.5 ; R12.2 -8.817,2.734 -9.051,2.5 -10.5,2.5
DC_EN: DD3.18 XS2.1 | length 33.3
  Top Layer w0.2: XS2.1 -6.1,-17.98 -6.1,-6.08 -3.427,-3.407 -3.427,8.418 -3.15,8.695 -3.15,11.49 -3.635,11.975 DD3.18
DE: DD3.26 XS9.1 | length 49.5
  Top Layer w0.2: DD3.26 -5.1,15.366 -4.552,15.914 v1(-2.521,15.914)
  Bottom Layer w0.2: v1(-2.521,15.914) -3.25,15.185 -3.25,9 -3.85,8.4 -3.85,-4.334 -2.6,-5.584 -2.6,-13.462 0.969,-17.031 9.531,-17.031 10.16,-17.66 XS9.1
GND: BQ1.2 C1.1 C2.1 C3.1 C4.1 C5.1 C6.1 C7.1 C8.1 C10.1 C11.1 C12.1 C13.1 C14.1 C15.1 C16.1 C17.1 C18.1 C19.1 C20.1 C21.1 C22.1 C24.1 C26.2 C28.1 DD1.3 DD2.3 DD3.0 DD4.2 DD5.4 DD6.4 DD7.12 DD7.28 DD7.35 DD7.36 DD7.38 DD7.39 DD7.46 DD7.47 DD7.52 DD7.56 DD7.65 pad.0 R17.2 TP1.1 TP19.1 XS10.10 XS12.6 XS14.2 | length 14.1
  Top Layer w0.2: v1(-7.6,16.725) BQ1.2
  Top Layer w0.3: DD6.4 -5,-7.5 -4.627,-7.126 v1(-4.627,-6.349)
  Top Layer w0.4: C8.1 -14.625,10.675 v1(-14.625,9.625)
  Bottom Layer w0.2: C19.1 -1.832,3.339 C17.1 -0.693,2.2 DD7.56 ; C16.1 C14.1 -0.953,-0.2 DD7.52
  Bottom Layer w0.3: v1(0,10.9) C18.1 C13.1 ; C28.1 C24.1 5.812,10.913 5.812,11.762 C21.1 C26.2
  other v1: -8,-24 -4,-24 -12,-22 -8,-21 12,-19 15,-19 -11.586,-18.54 -16,-18 -7.5,-17.5 -5.5,-17.5 -13,-17 18,-17 -2,-16 2,-16 12,-16 15,-16 -19,-15 4,-15 5.5,-15 7.5,-15 9.5,-15 20,-15 -7.5,-14.5 -5.5,-14.5 -14,-14 -11,-14 0,-14 17,-14 3.5,-13.5 9.5,-13.5 -17,-13 21,-13 -2,-12 9.5,-12 19,-12 -8.9,-11.5 -7.5,-11.5 -5.5,-11.5 3.5,-11.5 -22,-11 -19,-11 -12,-11 0,-11 22,-11 4.5,-10.5 7.5,-10.5 9.5,-10.5 5.5,-9.5 7.5,-8.5 19,-8 5.5,-7.5 -22,-7 -19,-7 -13,-7 22,-7 7.5,-6.5 -2,-6 4.5,-6 8,-5.5 -8,-5 6,-4.5 9,-4.5 2.258,-4.405 12.754,-3.128 -5,-3 22,-3 -22,-2 13.505,-1.413 -5,0 22,1 -12.678,1.493 -8.922,1.751 14.475,1.873 -18,2 -14.6,2.4 -5,3 -9.729,5.977 -14.6,6 -8.2,6 -5,6 15.344,6.281 -8.2,9 11,9 15.308,9.009 17,10 13,11 -2.15,11.731 -1.002,12.154 11,13 15.324,13.133 6.977,13.644 -17,14 2,14 -13.533,14.102 -8.9,16.3 -17,17 -14.6,17.8 -12.5,17.8 -10.3,17.8 4,19 -12,20 -9.4,20.5 -5.2,20.5 -15,21 7,22 12,22 3.571,22.509 -13,23 -2,23.5 -5.015,23.904 -10,24 -8,25 2,25 7,25 -3,26
  other v2: -6.1,12.975
I2C0_SCL: DD3.16 XS4.1 | length 31.8
  Top Layer w0.2: XS4.1 -6.9,-18.28 -6.9,-5.749 -4.25,-3.099 -4.25,8.726 -3.95,9.026 -3.95,10.006 -4.694,10.75 -4.7,10.75 DD3.16
I2C0_SDA: DD3.17 XS3.1 | length 36.9
  Top Layer w0.2: XS3.1 -9.11,-20.05 -7.185,-20.05 -6.5,-19.365 -6.5,-5.914 -3.85,-3.264 -3.85,8.561 -3.55,8.861 -3.55,11.258 -3.867,11.575 DD3.17
LED1: DD6.5 R1.2 | length 3.5
  Top Layer w0.2: R1.2 -8.25,-5.75 -8,-6 DD6.5
LED2: DD3.13 R5.2 | length 17.3
  Top Layer w0.2: R5.2 -9.06,-4.5 -5.9,-1.34 DD3.13
LED3: DD3.12 R2.2 | length 15.9
  Top Layer w0.2: R2.2 -9.06,-3.25 -6.3,-0.49 DD3.12
LED4: DD3.11 R3.2 | length 14.5
  Top Layer w0.2: R3.2 -9.06,-2 -6.7,0.36 DD3.11
LED5: DD3.10 R6.2 | length 13.1
  Top Layer w0.2: R6.2 -9.06,-0.75 -7.1,1.21 DD3.10
LED6: DD3.9 R4.2 | length 11.7
  Top Layer w0.2: R4.2 -9.06,0.5 -7.5,2.06 DD3.9
MODE: DD3.19 XS1.1 | length 35.9
  Top Layer w0.2: DD3.19 -3.344,12.375 -3,12.031 -2.75,11.781 -2.75,8.529 -3.027,8.252 -3.027,-9.973 5.08,-18.08 XS1.1
NetBQ1_1: BQ1.1 DD3.31 | length 4.9
  Top Layer w0.2: BQ1.1 -8.15,18.675 -8.35,18.475 -8.35,16.616 -7.1,15.366 DD3.31
NetBQ1_3: BQ1.3 DD3.30 | length 2.6
  Top Layer w0.2: BQ1.3 -6.85,15.75 -6.7,15.6 DD3.30
NetBQ1_4: BQ1.4 C1.2 L1.2 | length 3.8
  Top Layer w0.2: BQ1.4 C1.2 L1.2
NetC3_2: C3.2 DD3.1 | length 2.5
  Top Layer w0.2: C3.2 -10.3,14.975 -9.7,14.375 DD3.1
NetC9_1: C9.1 DD6.6 | length 1.8
  Top Layer w0.25: C9.1 -9,-7.75 -8.5,-8.25 DD6.6
NetC9_2: C9.2 DD6.7 R10.2 | length 4.9
  Top Layer w0.25: R10.2 -10.9,-8.75 ; C9.2 -10.9,-8.75 ; DD6.7 -10.9,-8.75
NetC20_2: C20.2 L3.2 XS14.1 | length 3.4
  Bottom Layer w0.37: XS14.1 C20.2 L3.2
NetC21_2: C21.2 C26.1 DD7.10 L4.2 | length 4.7
  Bottom Layer w0.25: DD7.10 6.75,9 7,9.25 L4.2 7,11 6.825,11.175 C21.2 C26.1
NetC23_1: C23.1 DD4.4 R16.2 R17.1 | length 4.7
  Top Layer w0.2: R17.1 8.102,17.085 ; DD4.4 8.102,18.648 8.102,17.085 ; C23.1 8.85,17.062 R16.2 8.102,17.085
NetDD1_2: DD1.2 DD3.21 | length 11.2
  Top Layer w0.2: DD3.21 2.476,13.175 4.551,11.1 5.063,11.1 5.5,10.663 DD1.2
NetDD2_4: DD2.4 DD3.20 | length 7.1
  Top Layer w0.2: DD3.20 2,12.775 2.15,12.625 DD2.4
NetDD4_5: DD4.5 L2.1 | length 2.1
  Top Layer w0.4: DD4.5 9.975,18.725 11.975,18.725 L2.1
NetDD7_4: DD7.4 R14.2 | length 1.9
  Bottom Layer w0.25: R14.2 2.9,9.1 3.15,8.85 DD7.4
NetDD7_6: DD7.6 R15.2 | length 1.9
  Bottom Layer w0.25: R15.2 3.9,9.23 4.29,8.84 4.29,8.21 DD7.6
NetDD7_9: DD7.9 TP9.1 | length 9.5
  Top Layer w0.2: v1(6.104,9.092) 9.521,9.092 v1(10.379,9.949)
  Bottom Layer w0.2: v1(6.104,9.092) v1@6.127,9.069 ; DD7.9@6.127,8.173 DD7.9 ; v1(10.379,9.949) 10.404,9.975 14.275,9.975 TP9.1
  Bottom Layer w0.3: DD7.9@6.127,8.173 v1@6.127,9.069
NetDD7_13: DD7.13 L4.1 | length 2.2
  Bottom Layer w0.25: DD7.13 8.55,8.8 9,9.25 L4.1
NetDD7_21: DD7.21 TP13.1 | length 3
  Bottom Layer w0.2: DD7.21 13.8,4.6 TP13.1
NetDD7_22: DD7.22 TP14.1 | length 3
  Bottom Layer w0.2: DD7.22 13.795,4 14.195,3.6 TP14.1
NetDD7_32: DD7.32 TP3.1 | length 5.8
  Bottom Layer w0.2: DD7.32 13.2,-2 13.5,-2.3 TP3.1
NetDD7_33: DD7.33 TP4.1 | length 3.5
  Bottom Layer w0.2: DD7.33 10.35,-4.284 12,-5.934 TP4.1
NetDD7_34: DD7.34 TP5.1 | length 3.2
  Bottom Layer w0.2: DD7.34 9.75,-4.25 10.5,-5 TP5.1
NetDD7_50: DD7.50 TP7.1 | length 4
  Bottom Layer w0.2: TP7.1 -1.394,-2.594 -1.394,-2.269 -0.525,-1.4 DD7.50
NetDD7_51: DD7.51 TP6.1 | length 3.4
  Bottom Layer w0.2: TP6.1 -2.464,-2.3 -2.083,-1.919 -1.644,-1.919 -0.525,-0.8 DD7.51
NetDD7_59: DD7.59 TP12.1 | length 3
  Bottom Layer w0.2: TP12.1 -2,4 DD7.59
NetDD7_60: DD7.60 TP11.1 | length 3.4
  Bottom Layer w0.2: TP11.1 -1.1,4.6 DD7.60
NetDD7_61: DD7.61 TP10.1 | length 4
  Bottom Layer w0.2: TP10.1 -1.503,6.503 -1.503,6.178 -0.525,5.2 DD7.61
NetDD7_62: DD7.62 TP8.1 | length 4.7
  Bottom Layer w0.2: TP8.1 -1.103,8.603 -1.103,6.378 -0.525,5.8 DD7.62
NetR1_1: R1.1 XS10.2 | length 8.4
  Top Layer w0.2: XS10.2 -18.795,-4.5 -17.5,-4.5 -16.25,-5.75 R1.1
NetR2_1: R2.1 XS10.3 | length 4.3
  Top Layer w0.2: XS10.3 -15.185,-3.25 R2.1
NetR3_1: R3.1 XS10.5 | length 4.3
  Top Layer w0.2: XS10.5 -15.165,-2 R3.1
NetR4_1: R4.1 XS10.9 | length 4.3
  Top Layer w0.2: XS10.9 -15.125,0.5 R4.1
NetR5_1: R5.1 XS10.1 | length 4.3
  Top Layer w0.2: XS10.1 -15.195,-4.5 R5.1
NetR6_1: R6.1 XS10.7 | length 4.3
  Top Layer w0.2: XS10.7 -15.145,-0.75 R6.1
NetTP15_1: TP15.1 VD2.1 | length 1.7
  Bottom Layer w0.3: VD2.1 TP15.1
NetVD1_1: VD1.1 XS12.1 | length 2.2
  Top Layer w0.2: XS12.1 -12.03,7.48 -11.75,7.2 VD1.1
nRST: C11.2 DD7.44 R13.1 TP2.1 TP16.1 | length 68.8
  Top Layer w0.3: TP2.1 1.5,-13.864 4.636,-17 16,-17 20.9,-12.1 20.9,0.7 19.9,1.7 18.3,1.7 16,4 v1(16,17.5)
  Bottom Layer w0.2: R13.1 C11.2 3.35,-5.4 3.75,-5 DD7.44
  Bottom Layer w0.25: TP2.1 1.75,-8.5 2.7,-7.55 R13.1
  Bottom Layer w0.3: v1(16,17.5) 16.081,17.5 16.831,16.75 TP16.1
RE: DD3.27 XS8.1 | length 47.1
  Top Layer w0.2: DD3.27 -5.5,15.531 -4.531,16.5 -3.373,16.5 v1(-3.338,16.535)
  Bottom Layer w0.2: v1(-3.338,16.535) -3.7,16.173 -3.7,9.276 -4.25,8.726 -4.25,-4.5 -3,-5.75 -3,-13.628 0.803,-17.431 6.051,-17.431 XS8.1
RF_ANT: C15.2 DD7.37 L3.1 | length 4.6
  Bottom Layer w0.37: L3.1 C15.2 6.6,-5.75 cw(c7.204,-5.75) 6.777,-5.323 7.85,-4.25 ccw(c7.609,-4.009) 7.95,-4.009 DD7.37
RST: C8.2 R7.2 R8.1 XS12.3 | length 7.6
  Top Layer w0.4: XS12.3 -13.325,7.825 -13.325,10.675 C8.2 R7.2 -11.6,11.4 -11.25,11.75 -10.534,11.75 -10.3,11.984 R8.1
RST_MCU: DD3.4 R9.2 | length 7.4
  Top Layer w0.2: R9.2 -14.6,13.383 -14.483,13.5 -9.5,13.5 -9.175,13.175 DD3.4
RX: DD3.28 DD6.1 XS6.1 | length 44.4
  Top Layer w0.2: DD3.28 -5.9,16.2 v1(-5.1,17) ; v1(-3.759,-9.249) -4.999,-9.249 -5,-10.5 0.5,-16 2.54,-18.04 XS6.1
  Bottom Layer w0.2: v1(-5.1,17) -5.1,15.1 -5.046,15.046 -5.046,11.888 -6,10.934 -6,-3.346 -3.4,-5.946 -3.4,-8.891 v1(-3.759,-9.249)
RxLoRa: DD2.2 DD7.29 | length 22.3
  Top Layer w0.3: DD2.2 1.5,8.7 2.2,8 12.3,8 13,7.3 13,1.4 12.8,1.2 v1(12.8,-0.1)
  Bottom Layer w0.3: DD7.29 12.3,-0.2 12.4,-0.1 v1(12.8,-0.1)
SPI0_CS: DD3.22 DD5.1 | length 13.4
  Top Layer w0.2: DD3.22 -1.175,13.575 v1(-0.75,14) ; DD5.1 -2.385,21.14 v1@-0.329,21.14
  Bottom Layer w0.2: v1(-0.75,14) 0.281,15.031 0.281,20.531 v1(-0.328,21.14)
SPI0_MISO: DD3.24 DD5.2 | length 10.3
  Top Layer w0.2: DD3.24 -2.225,14.375 v1(-1.6,15) ; DD5.2 -2.392,19.893 -0.341,19.893 v1@-0.319,19.871
  Bottom Layer w0.2: v1(-1.6,15) -0.319,16.281 v1@-0.319,19.871
  other v1: -0.328,19.871
SPI0_MOSI: DD3.23 DD5.5 | length 7.9
  Top Layer w0.2: DD3.23 -1.77,13.975 1.6,17.345 DD5.5
SPI0_SCK: DD3.25 DD5.6 | length 8.6
  Top Layer w0.2: DD3.25 -2.55,14.95 1.115,18.615 DD5.6
SWCLK: DD7.2 TP18.1 | length 57.8
  Top Layer w0.3: v1(-0.9,10.9) -0.9,10.874 -0.6,10.574 -0.6,10.093 1.993,7.5 10.507,7.5 11.9,6.107 11.9,-3.4 13.8,-5.3 16.33,-5.3 16.7,-4.93 16.7,1 16.395,1.305 16.388,1.305 14,3.693 v1(14,15.5)
  Bottom Layer w0.2: v1(-0.9,10.9) -0.876,10.876 -0.876,10.476 -0.053,9.653 0.4,9.2 1.563,9.2 1.888,8.875 1.888,8.212 DD7.2
  Bottom Layer w0.3: TP18.1 13.169,14.75 13.919,15.5 v1(14,15.5)
SWDIO: DD7.1 TP17.1 | length 60.2
  Top Layer w0.3: v1(-1.5,10.3) -1.1,9.9 -1.1,9.886 1.786,7 10.3,7 11.4,5.9 11.4,-3.607 13.593,-5.8 16.537,-5.8 17.2,-5.137 17.2,1.221 14.65,3.771 14.65,15.769 14.002,16.417 14.002,17.498 v1(14,17.5)
  Bottom Layer w0.25: v1(-1.5,10.3) 0.649,8.15 DD7.1
  Bottom Layer w0.3: TP17.1 13.169,16.75 13.919,17.5 v1(14,17.5)
TPS_EN: DD3.14 DD4.3 | length 27.5
  Top Layer w0.2: DD3.14 -5.5,10.325 -5.25,10.075 v1(-5.25,9.675) ; v1(7.1,20.3) 7.933,20.3 8.05,20.417 DD4.3
  Bottom Layer w0.2: v1(-5.25,9.675) -5.25,9.75 -4.5,10.5 -4.5,17.5 -4.75,17.75 -4.75,18.301 -4.8,18.351 -4.8,18.849 -4.75,18.899 -4.75,19.75 -2.75,21.75 6.25,21.75 7.1,20.9 v1(7.1,20.3)
TX: DD3.29 DD6.2 XS7.1 | length 43.7
  Top Layer w0.2: DD3.29 -6.3,16.678 -6,16.978 v1(-6,17) ; v1(-4,-8) -4,-8.5 -4.25,-8.75 DD6.2 -5.49,-8.75 -5.65,-8.91 -5.65,-10.501 0,-16.151 XS7.1
  Bottom Layer w0.2: v1(-6,17) -6,14.727 -5.446,14.174 -5.446,12.054 -6.4,11.1 -6.4,-3.512 -3.842,-6.07 -3.842,-7.191 -4,-7.348 v1(-4,-8)
TxLoRa: DD1.4 DD7.30 | length 19.8
  Top Layer w0.3: DD1.4 9.9,11.9 13.5,8.3 13.5,-0.5 13.157,-0.843 12.857,-0.843 v1(12.8,-0.9)
  Bottom Layer w0.3: DD7.30 12.3,-0.8 12.4,-0.9 v1(12.8,-0.9)
VDD: C2.2 C4.2 C5.2 C6.2 C10.2 DD2.5 DD3.2 DD3.3 DD4.1 DD5.7 DD5.8 DD6.3 DD6.8 L1.1 R7.1 R10.1 VD1.2 XS5.1 XS10.4 | length 156.2
  Top Layer w0.2: C5.2 -11.507,14.975 -10.507,13.975 DD3.2 DD3.3 ; R7.1@-10.299,10.699 -10.25,10.65 VD1.2 ; v1(-5.453,-6.919) -5.453,-7.027 -5.65,-7.225 -5.65,-8.024 -5.474,-8.2 -5.05,-8.2 DD6.3
  Top Layer w0.3: R7.1@-10.299,10.699 v1(-9.418,10.699) ; v1(-0.118,12.153) 0.825,12.153 0.85,12.128 DD2.5
  Top Layer w0.4: -16.05,14.987 -14.613,14.987 C6.2 C5.2 ; -15.082,-16.917 -9.6,-11.435 R10.1 -8.6,-9.75 DD6.8@-8.15,-9.3
  Top Layer w0.6: v1(-17,10.75) -16.05,10.75 ; XS5.1 -2.5,-19.04 -2.5,-20.4 -3.05,-20.95 -3.05,-21 C4.2 -3.15,-21.97 -3.501,-22.321 -9.679,-22.321 -15.082,-16.917 -20.486,-11.514 -20.486,-3.586 -20.135,-3.235 XS10.4 -17.251,-3.235 -16.9,-2.884 -16.9,2.493 -16,3.393 -16,8.581 -16.05,8.631 -16.05,10.75 ; DD5.7 DD5.8 2.4,23.5 ; v1(5,20.25) 5,23.5 ; DD4.1 9.95,21.907 9.65,22.207 9.65,23.6 9.25,24 7.25,24 6.75,23.5 5,23.5 ; -16.05,10.75 -16.05,14.987 -16.05,17.85 -11.425,22.475 L1.1 -8.18,22.545 -8.18,23.32 -6.5,25 0,25 0.65,24.35 C10.2 2.4,23.5 ; 2.4,23.5 5,23.5
  Bottom Layer w0.3: v1(-0.118,12.153) -0.118,13.642 5,18.76 v1(5,20.25)
  Bottom Layer w0.6: v1(-17,10.75) -9.469,10.75 v1(-9.418,10.699) ; v1(-5.453,-6.919) -5.453,-9.547 -4,-11 -4,-17.54 XS5.1
WP: DD3.15 DD5.3 | length 13.4
  Top Layer w0.2: DD3.15 -5.1,10.491 -4.55,9.941 v1(-4.55,9.275) ; v1@-4.293,18.607 -4.285,18.6 v1(-4.2,18.6) -4.193,18.607 -2.408,18.607 DD5.3
  Bottom Layer w0.2: v1(-4.55,9.275) -4.1,9.725 -4.1,17.666 -4.2,17.766 v1(-4.2,18.6)
pads on no net: DD1. DD1.1 DD2. DD2.1 DD3.6 DD3.7 DD3.8 DD3.32 DD4. DD6. DD7.5 DD7.8 DD7.14 DD7.15 DD7.16 DD7.17 DD7.18 DD7.19 DD7.20 DD7.23 DD7.24 DD7.25 DD7.26 DD7.27 DD7.31 DD7.40 DD7.41 DD7.42 DD7.43 DD7.45 DD7.48 DD7.49 DD7.57 DD7.58 DD7.63 DD7.64 XS10.6 XS10.8 XS11.1 XS11.2 XS11.3 XS11.4 XS11.5 XS11.6 XS11.7 XS11.8 XS11.9 XS11.10

## Polygon pours and split planes (outlines as drawn)
GND on Bottom Layer "GND_L02_P007" (solid, pour order 7): -27,0 ccw(c0,0) 0,-27 ccw(c0,0) 27,0 ccw(c0,0) 0,27 ccw(c0,0)
1V8 on Bottom Layer "1V8_L02_P003" (solid, pour order 3): 4.75,10.748 4.75,14.75 ccw(c4.25,14.75) 4.25,15.25 3.25,15.25 ccw(c3.25,14.75) 2.75,14.75 2.75,10.748
1V8 on Bottom Layer "1V8_L02_P000" (solid, pour order 0): -3.338,2.165 -3.338,0.152 0.754,0.152 0.754,1.7 -1.246,1.7 -1.246,2.165
GND on Top Layer "GND_L01_P008" (solid, pour order 8): -27,0 ccw(c0,0) 0,-27 ccw(c0,0) 27,0 ccw(c0,0) 0,27 ccw(c0,0)
1V8 on Top Layer "1V8_L01_P006" (solid, pour order 6): -2.721,0.6 -0.8,0.6 -0.8,2.001 -2.2,2.001 -2.2,1.6 -2.721,1.6
1V8 on Top Layer "1V8_L01_P002" (solid, pour order 2): 3.25,14.25 cw(c3.25,14.75) 2.75,14.75 cw(c3.25,14.75) 3.25,15.25 4.25,15.25 cw(c4.25,14.75) 4.75,14.75 cw(c4.25,14.75) 4.25,14.25

## Silkscreen, mask and mechanical layers (free items; w line width, h text height)
Top Overlay:
  text "biv2-LRF_1a" at -21.614,1 h2.5 r270
Bottom Overlay:
  lines w0.1: 12,14 18,14 18,17.5 12,17.5 12,14
Board:
  circle w0.15: c6,-12.5 r5.025
  circle w0.1: c0,0 r27